# EAGLE board Temperatura de Piscina (EAGLE 9.7.0)

Size 86.32 x 141.36 mm. Coordinates in mm from the lower left corner, seen from the top.
Outline: 0,0 86.32,0 86.32,141.36 0,141.36 0,0
Copper layers (1*16): Top 0.035mm / dielectric 1.5mm / Bottom 0.035mm
Design rules "default": minimum track width 6mil, minimum drill 0.35mm, track to track 6mil, track to pad 6mil, pad to pad 6mil, via to via 6mil, smd to smd 6mil, copper to edge 40mil, drill to drill 6mil, minimum pad ring 10mil, minimum via ring 8mil, stop-mask expansion 4mil, vias tented up to drill 0mil, thermal gap 10mil

## Footprints (pad centres in the part's own frame; a part is rotated, then mirrored left to right if it is on the bottom)
LEDRD254W60D565H860B_G = drill 0.981 pad 1.581: 1 -1.27,0; 2 1.27,0
LEDRD254W60D565H860B_O = drill 0.981 pad 1.581: 1 -1.27,0; 2 1.27,0
LEDRD254W60D565H860B = drill 0.981 pad 1.581: 1 -1.27,0; 2 1.27,0
LEDRD254W60D565H860B_B = drill 0.981 pad 1.581: 1 -1.27,0; 2 1.27,0
7SEG-13 = drill 0.813 long: 1 -5.08,-7.62; 2 -2.54,-7.62; 3 0,-7.62; 4 2.54,-7.62; 5 5.08,-7.62; 6 5.08,7.62; 7 2.54,7.62; 8 0,7.62; 9 -2.54,7.62; 10 -5.08,7.62
PIEZO = drill 1 pad 1.6: 1 -3.5,0; 2 3.5,0
GL5528 = drill 0.8 pad 1.4: 1 -1.702,0; 2 1.702,0
RESAD1016W63L850D250B = drill 0.83 pad 1.43: 1 -5.08,0; 2 5.08,0
HA-06-SM065 = drill 1 pad 1.676: 1 -2.54,-2.54; 2 0,2.54; 3 2.54,-2.54
SWITCH-MOMENTARY-PTH-6.5MM = drill 1.016 pad 1.88: 1 -3.251,2.261; 2 3.251,2.261; 3 -3.251,-2.261; 4 3.251,-2.261
ARDUINO-UNO-R3-SHIELD = drill 1.016 pad 1.88: 3.3V 24.13,-2.54; 5V 24.13,0; A0 24.13,12.7; A1 24.13,15.24; A2 24.13,17.78; A3 24.13,20.32; A4 24.13,22.86; A5 24.13,25.4; AREF -24.13,-13.97; D2 -24.13,20.32; D3 -24.13,17.78; D4 -24.13,15.24; D5 -24.13,12.7; D6 -24.13,10.16; D7 -24.13,7.62; D8 -24.13,3.81; D9 -24.13,1.27; D10 -24.13,-1.27; D11 -24.13,-3.81; D12 -24.13,-6.35; D13 -24.13,-8.89; GND@0 24.13,2.54; GND@1 24.13,5.08; GND@2 -24.13,-11.43; IOREF 24.13,-7.62; NC 24.13,-10.16; RES 24.13,-5.08; RX -24.13,25.4; SCL -24.13,-19.05; SDA -24.13,-16.51; TX -24.13,22.86; VIN 24.13,7.62

## Placement (x,y rotation side)
D1  GREEN  [LEDRD254W60D565H860B_G]  7.6,119.64 180 top
D2  ORANGE  [LEDRD254W60D565H860B_O]  12.68,119.64 180 top
D3  RED  [LEDRD254W60D565H860B]  17.76,119.64 180 top
D4  BLUE  [LEDRD254W60D565H860B_B]  22.84,119.64 180 top
DIGIT1  7SEG-CK  [7SEG-13]  64.75,127.26 0 top
PIEZO1  PIEZO  [PIEZO]  35.54,112.02 180 top
R1  PHOTOCELL_GL5528  [GL5528]  78.72,114.56 0 top
R2  100k  [RESAD1016W63L850D250B]  41.89,124.72 90 top
R3  10k  [RESAD1016W63L850D250B]  79.99,127.26 90 top
R4  200  [RESAD1016W63L850D250B]  64.75,109.48 90 top
R5  1k  [RESAD1016W63L850D250B]  6.33,127.26 90 top
R6  1k  [RESAD1016W63L850D250B]  11.41,127.26 90 top
R7  1k  [RESAD1016W63L850D250B]  16.49,127.26 90 top
R8  1k  [RESAD1016W63L850D250B]  21.57,127.26 90 top
RPOT1  250k  [HA-06-SM065]  49.51,112.02 0 top
S1  SWITCH_MOMENTARY  [SWITCH-MOMENTARY-PTH-6.5MM]  34.27,125.99 90 top
U1  ARDUINO-UNO-R3-SHIELD  [ARDUINO-UNO-R3-SHIELD]  55.01,47.88 0 top

## Library data of the parts
D1 = Tinkercad; CATEGORY: Opto-Electronic; SUB-CATEGORY: LED; VALUE: LED_GREEN
D2 = Tinkercad; CATEGORY: Opto-Electronic; SUB-CATEGORY: LED; VALUE: LED_ORANGE
D3 = Tinkercad; CATEGORY: Opto-Electronic; SUB-CATEGORY: LED; VALUE: LED_RED
D4 = Tinkercad; CATEGORY: Opto-Electronic; SUB-CATEGORY: LED; VALUE: LED_BLUE
DIGIT1 = Tinkercad; CATEGORY: Opto-Electronic; SUB-CATEGORY: Display; TYPE: 7-Segment
PIEZO1 R1-R8 RPOT1 S1 U1 = Tinkercad

## Nets
D1_C: D1.2 R5.1
D2_C: D2.2 R6.1
D3_C: D3.2 R7.1
D4_C: D4.2 R8.1
DIGIT1_CK1: DIGIT1.3 R4.2
PIEZO1_1: PIEZO1.1 R2.1
U1_5V: R1.1 RPOT1.3 U1.5V
U1_A0: RPOT1.2 U1.A0
U1_A1: R1.2 R3.1 U1.A1
U1_A2: DIGIT1.10 U1.A2
U1_D2: D1.1 U1.D2
U1_D3: D2.1 U1.D3
U1_D4: D3.1 U1.D4
U1_D5: R2.2 U1.D5
U1_D6: S1.3 S1.4 U1.D6
U1_D7: D4.1 U1.D7
U1_D8: DIGIT1.7 U1.D8
U1_D9: DIGIT1.6 U1.D9
U1_D10: DIGIT1.4 U1.D10
U1_D11: DIGIT1.2 U1.D11
U1_D12: DIGIT1.1 U1.D12
U1_D13: DIGIT1.9 U1.D13
U1_GND: PIEZO1.2 R3.2 R4.1 R5.2 R6.2 R7.2 R8.2 RPOT1.1 S1.1 S1.2 U1.GND@0 U1.GND@1 U1.GND@2

## Tracks (layer width: path | path; a pad name or v marks a point on that pad's centre or on a via)
D1_C  (1 unrouted)
D2_C  (1 unrouted)
D3_C  (1 unrouted)
D4_C  (1 unrouted)
DIGIT1_CK1  (1 unrouted)
PIEZO1_1  (1 unrouted)
U1_5V  (2 unrouted)
U1_A0  (1 unrouted)
U1_A1  (2 unrouted)
U1_A2  (1 unrouted)
U1_D2  (1 unrouted)
U1_D3  (1 unrouted)
U1_D4  (1 unrouted)
U1_D5  (1 unrouted)
U1_D6  (2 unrouted)
U1_D7  (1 unrouted)
U1_D8  (1 unrouted)
U1_D9  (1 unrouted)
U1_D10  (1 unrouted)
U1_D11  (1 unrouted)
U1_D12  (1 unrouted)
U1_D13  (1 unrouted)
U1_GND  (12 unrouted)